# Altium PCB Main.PcbDoc (part 1 of 4)
Units mil, origin at the board's own origin, x right, y up, seen from the top; angles counter-clockwise.
Board outline 16000 x 4900 mil, 4 copper layers (L1-Top, L2-Mid-A, L3-Mid-B, L4-Bottom), stack 285.556 mil thick; 96 components, 105 nets, 278 pads, 8355 vias.
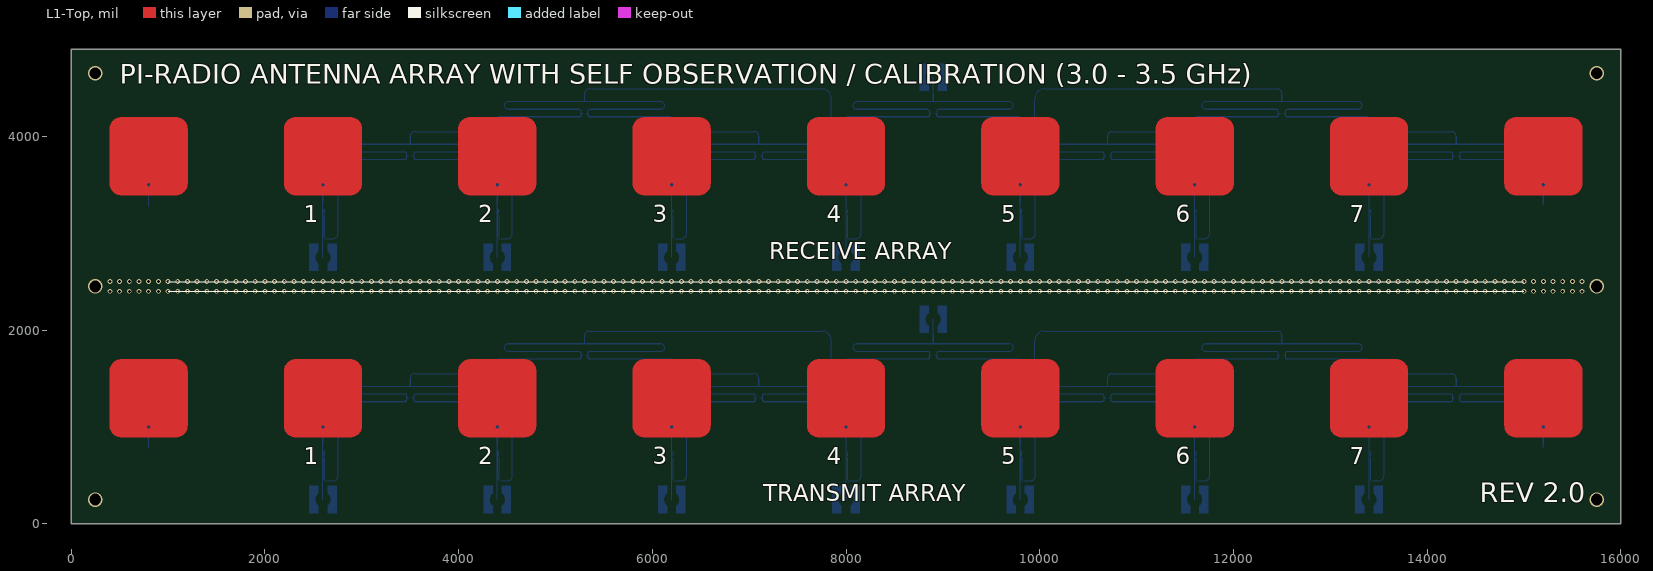
[diagram p0: L1-Top view]
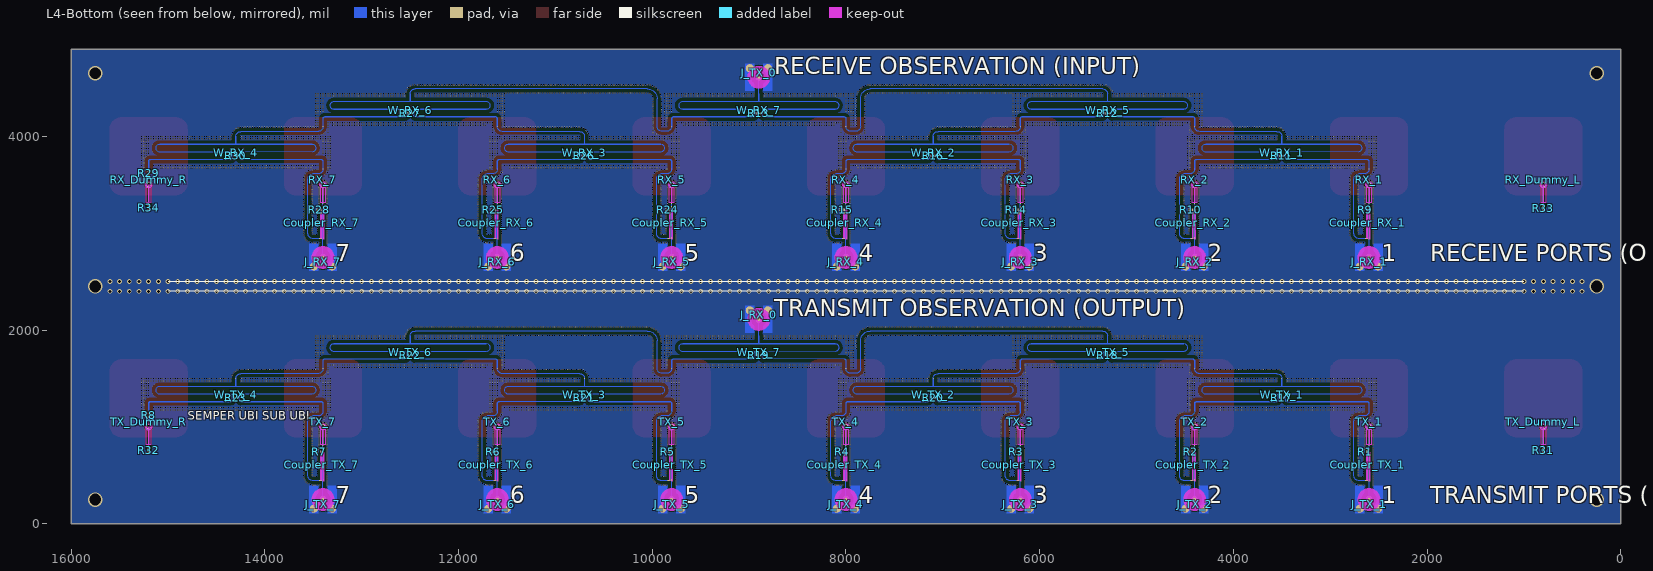
[diagram p1: L4-Bottom view, seen from below]
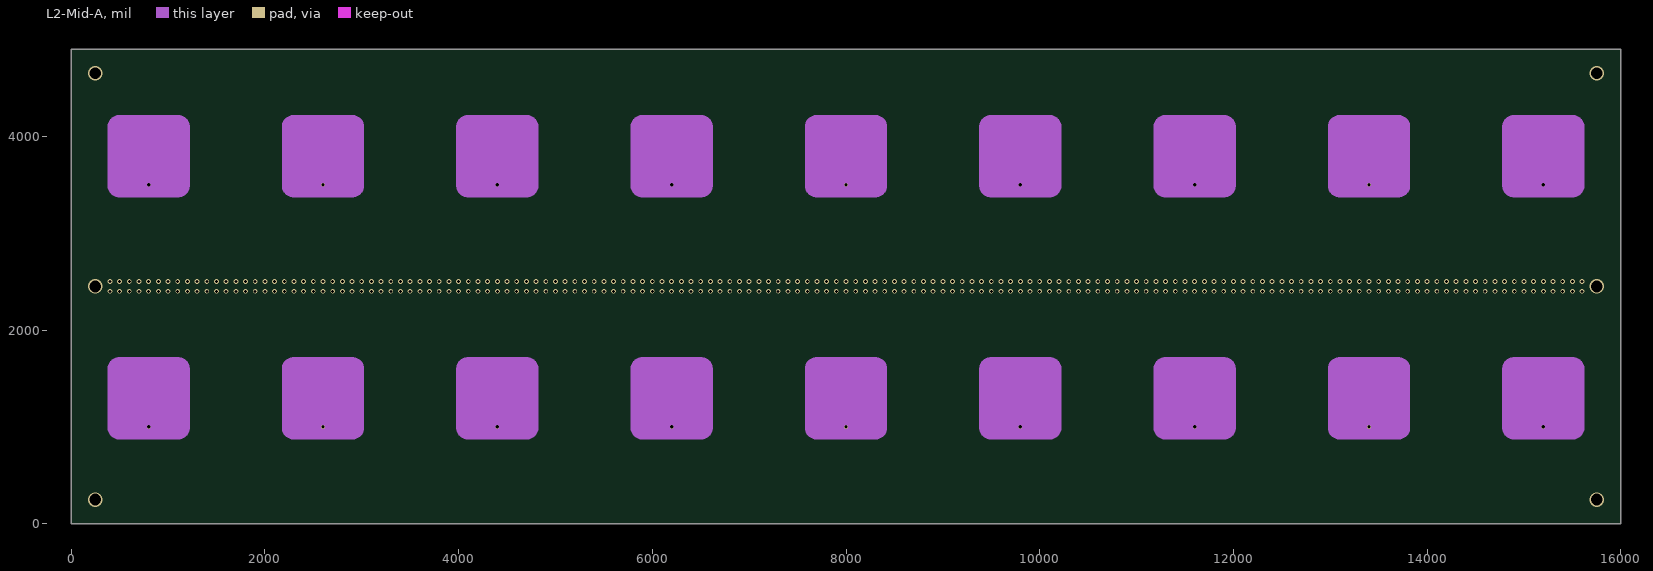
[diagram p2: L2-Mid-A]
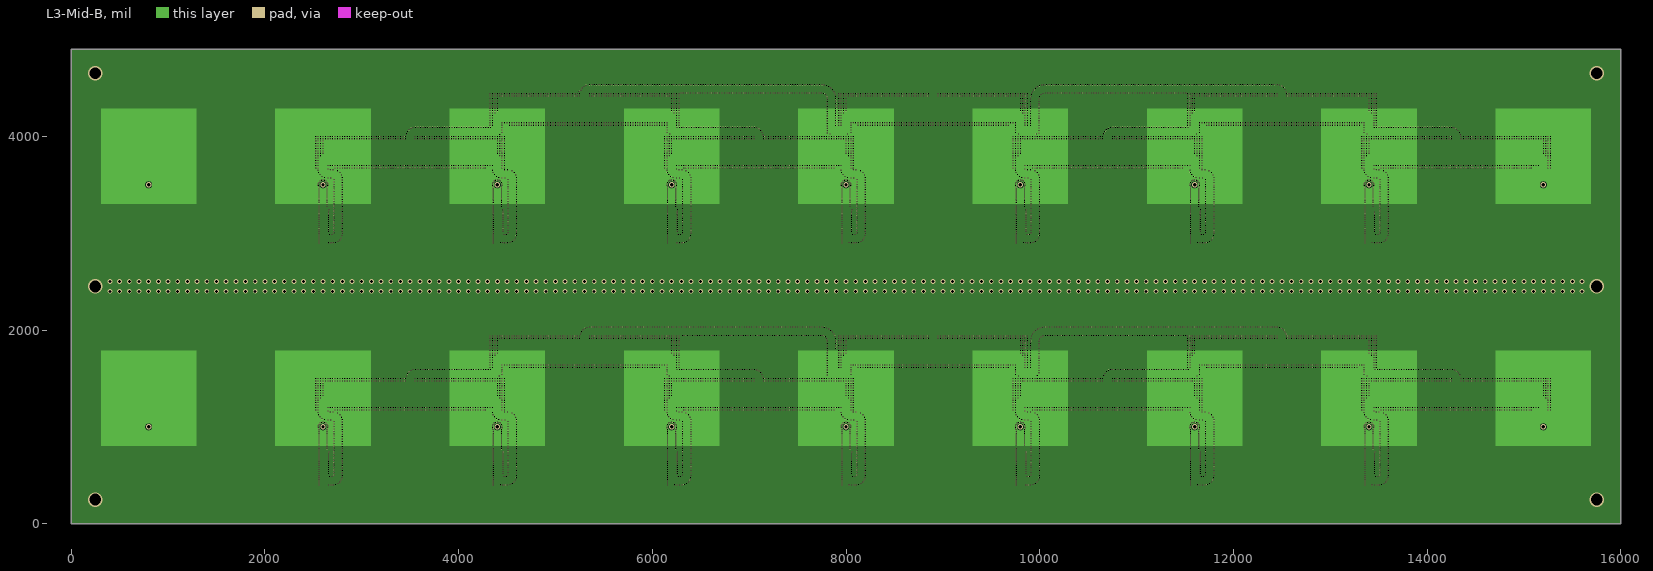
[diagram p3: L3-Mid-B]
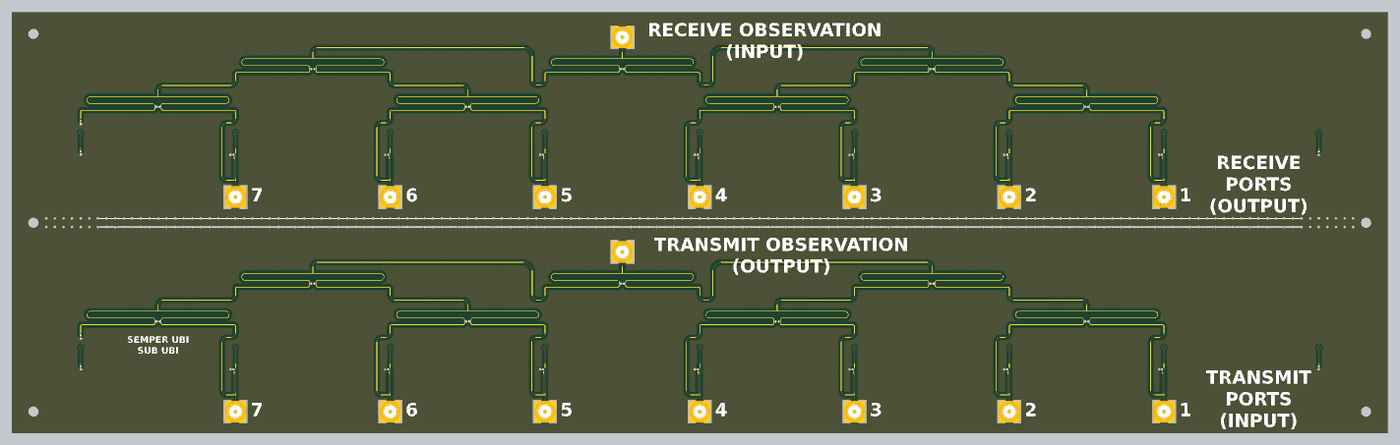
[diagram p7: 3D render of the assembled board from below, using the file's embedded part models]

## Layer stack, top to bottom
Top Solder: solder mask 0.4, Solder Resist, Dk 3.5
L1-Top: signal copper 1.4
Dielectric 1: prepreg 138, FR408HR, Dk 3.7
L2-Mid-A: signal copper 1.4
Dielectric 2: prepreg 138, FR408HR, Dk 3.7
L3-Mid-B: signal copper 1.378
Dielectric 3: prepreg 4, Isola I-Speed, Dk 3.7
L4-Bottom: signal copper 1.378
Bottom Solder: solder mask 0.4, Solder Resist, Dk 3.5

## Board outline
0,0 16000,0 16000,4900 0,4900

## Design rules (kind name [scope] priority, off if disabled: settings)
Clearance Clearance_Connector [HasFootprint('AMPHENOL RF 132134-10 USTRIP 9.4MIL WIDTH') vs HasFootprint('AMPHENOL RF 132134-10 USTRIP 9.4MIL WIDTH')] p1: gap=0 ignorepadtopadclearanceinfootprint=FALSE
Clearance Clearance_uStrip_50 [InNetClass('uStrip_50')] p2: gap=0 ignorepadtopadclearanceinfootprint=FALSE except(30: Arc-Poly Track-Poly)
Clearance Clearance_Coupler_Intra [HasFootprint('COUPLER_V1') vs HasFootprint('COUPLER_V1')] p3: gap=0 ignorepadtopadclearanceinfootprint=FALSE
Clearance Clearance_Coupler [HasFootprint('COUPLER_V1')] p4: gap=0 ignorepadtopadclearanceinfootprint=FALSE except(30: Fill-Poly)
Clearance Clearance_Wilkinson [HasFootprint('Wilkinson_v1')] p5: gap=0 ignorepadtopadclearanceinfootprint=FALSE except(30: Arc-Fill Arc-Poly Arc-Region Track-Fill Track-Poly Track-Region; 35: Poly-Region)
Clearance [All] p6: gap=10 ignorepadtopadclearanceinfootprint=FALSE
HoleSize [All] p1: absolutevalues=TRUE maxlimit=120 minlimit=1 maxpercent=80.000 minpercent=20.000
MinimumSolderMaskSliver [All] p1: minsoldermaskwidth=5
PolygonConnect [All] p1: connectstyle=Direct reliefconductorwidth=10 reliefentries=4 polygonreliefangle="90 Angle" airgapwidth=10
RoutingVias [All] p1: holewidth=28 width=50 viastyle="Through Hole" minholewidth=28 minwidth=50 maxholewidth=28 maxwidth=50
SolderMaskExpansion [All] p1: expansion=4 istentingtop=FALSE
SupplyNets "Schematic Supply Nets" [InNet('GND')] p1: voltage=0.000
Width [All] p1: maxlimit=10 minlimit=9.4 preferedwidth=10 toplayer_minwidth=10 midlayer1_minwidth=10 midlayer2_minwidth=10 bottomlayer_prefwidth=9.4 minimp=50.000000 maximp=50.000000 favimp=50.000000
28 further rules are at their usual default settings.

## Classes and differential pairs
net class uStrip_50: CB_RX_1 CB_RX_2 CB_RX_3 CB_RX_4 CB_RX_5 CB_RX_6 CB_RX_7 CB_TX_1 CB_TX_2 CB_TX_3 CB_TX_4 CB_TX_5 CB_TX_6 CB_TX_7 NetCoupler_RX_1_In NetCoupler_RX_1_Out NetCoupler_RX_2_In NetCoupler_RX_2_Out NetCoupler_RX_3_In NetCoupler_RX_3_Out NetCoupler_RX_4_In NetCoupler_RX_4_Out NetCoupler_RX_5_In NetCoupler_RX_5_Out NetCoupler_RX_6_In NetCoupler_RX_6_Out NetCoupler_RX_7_In NetCoupler_RX_7_Out NetCoupler_TX_1_In NetCoupler_TX_1_Out NetCoupler_TX_2_In NetCoupler_TX_2_Out NetCoupler_TX_3_In NetCoupler_TX_3_Out NetCoupler_TX_4_In NetCoupler_TX_4_Out NetCoupler_TX_5_In NetCoupler_TX_5_Out NetCoupler_TX_6_In NetCoupler_TX_6_Out NetCoupler_TX_7_In NetCoupler_TX_7_Out NetR31_2 NetR32_2 NetR33_2 NetR34_2 Obs_RX_8 Obs_RX_12 Obs_RX_34 Obs_RX_56 Obs_RX_78 Obs_RX_1234 Obs_RX_5678 Obs_RX_All Obs_TX_8 Obs_TX_12 Obs_TX_34 Obs_TX_56 Obs_TX_78 Obs_TX_1234 Obs_TX_5678 Obs_TX_All

## Components (designator, comment, footprint, x,y, rotation, side; value= is the part's Value field where it differs from the comment)
Coupler_RX_1 "Coupler" COUPLER_V1 2600,2940 r90 top locked net-tie
Coupler_RX_2 "Coupler" COUPLER_V1 4400,2940 r90 top locked net-tie
Coupler_RX_3 "Coupler" COUPLER_V1 6200,2940 r90 top locked net-tie
Coupler_RX_4 "Coupler" COUPLER_V1 8000,2940 r90 top locked net-tie
Coupler_RX_5 "Coupler" COUPLER_V1 9800,2940 r90 top locked net-tie
Coupler_RX_6 "Coupler" COUPLER_V1 11600,2940 r90 top locked net-tie
Coupler_RX_7 "Coupler" COUPLER_V1 13400,2940 r90 top locked net-tie
Coupler_TX_1 "Coupler" COUPLER_V1 2600,440 r90 top locked net-tie
Coupler_TX_2 "Coupler" COUPLER_V1 4400,440 r90 top locked net-tie
Coupler_TX_3 "Coupler" COUPLER_V1 6200,440 r90 top locked net-tie
Coupler_TX_4 "Coupler" COUPLER_V1 8000,440 r90 top locked net-tie
Coupler_TX_5 "Coupler" COUPLER_V1 9800,440 r90 top locked net-tie
Coupler_TX_6 "Coupler" COUPLER_V1 11600,440 r90 top locked net-tie
Coupler_TX_7 "Coupler" COUPLER_V1 13400,440 r90 top locked net-tie
J_RX_0 "Amphenol RF 132134-10" "AMPHENOL RF 132134-10 USTRIP 9.4MIL WIDTH" 8900,2110 r0 bottom
J_RX_1 "Amphenol RF 132134-10" "Amphenol RF 132134-10 uStrip 9.4mil width" 2600,2750 r180 bottom locked
J_RX_2 "Amphenol RF 132134-10" "Amphenol RF 132134-10 uStrip 9.4mil width" 4400,2750 r180 bottom locked
J_RX_3 "Amphenol RF 132134-10" "Amphenol RF 132134-10 uStrip 9.4mil width" 6200,2750 r180 bottom locked
J_RX_4 "Amphenol RF 132134-10" "Amphenol RF 132134-10 uStrip 9.4mil width" 8000,2750 r180 bottom locked
J_RX_5 "Amphenol RF 132134-10" "Amphenol RF 132134-10 uStrip 9.4mil width" 9800,2750 r180 bottom locked
J_RX_6 "Amphenol RF 132134-10" "Amphenol RF 132134-10 uStrip 9.4mil width" 11600,2750 r180 bottom locked
J_RX_7 "Amphenol RF 132134-10" "Amphenol RF 132134-10 uStrip 9.4mil width" 13400,2750 r180 bottom locked
J_TX_0 "Amphenol RF 132134-10" "Amphenol RF 132134-10 uStrip 9.4mil width" 8900,4610 r0 bottom
J_TX_1 "Amphenol RF 132134-10" "AMPHENOL RF 132134-10 USTRIP 9.4MIL WIDTH" 2600,250 r180 bottom
J_TX_2 "Amphenol RF 132134-10" "AMPHENOL RF 132134-10 USTRIP 9.4MIL WIDTH" 4400,250 r180 bottom
J_TX_3 "Amphenol RF 132134-10" "AMPHENOL RF 132134-10 USTRIP 9.4MIL WIDTH" 6200,250 r180 bottom
J_TX_4 "Amphenol RF 132134-10" "AMPHENOL RF 132134-10 USTRIP 9.4MIL WIDTH" 8000,250 r180 bottom
J_TX_5 "Amphenol RF 132134-10" "AMPHENOL RF 132134-10 USTRIP 9.4MIL WIDTH" 9800,250 r180 bottom
J_TX_6 "Amphenol RF 132134-10" "AMPHENOL RF 132134-10 USTRIP 9.4MIL WIDTH" 11600,250 r180 bottom
J_TX_7 "Amphenol RF 132134-10" "AMPHENOL RF 132134-10 USTRIP 9.4MIL WIDTH" 13400,250 r180 bottom
R1 "50" SMD-0402#1 2640.59,742.2 r180 bottom
R2 "50" SMD-0402#1 4440.59,742.2 r180 bottom
R3 "50" SMD-0402#1 6240.59,742.2 r180 bottom
R4 "50" SMD-0402#1 8040.59,742.2 r180 bottom
R5 "50" SMD-0402#1 9840.59,742.2 r180 bottom
R6 "50" SMD-0402#1 11640.59,742.2 r180 bottom
R7 "50" SMD-0402#1 13440.59,742.2 r180 bottom
R8 "50" SMD-0402#2 15200,1120 r90 bottom
R9 "50" SMD-0402#1 2640.59,3242.2 r180 bottom locked
R10 "50" SMD-0402#1 4440.59,3242.2 r180 bottom locked
R11 "100" SMD-0402#1 3500,3800.4 r180 bottom locked
R12 "100" SMD-0402#1 5300,4240.4 r180 bottom locked
R13 "100" SMD-0402#1 8900,4240.4 r180 bottom locked
R14 "50" SMD-0402#1 6240.59,3242.2 r180 bottom locked
R15 "50" SMD-0402#1 8040.59,3242.2 r180 bottom locked
R16 "100" SMD-0402#1 7100,3800.4 r180 bottom locked
R17 "100" SMD-0402#1 3500,1300.4 r180 bottom locked
R18 "100" SMD-0402#1 5300,1740.4 r180 bottom locked
R19 "100" SMD-0402#1 8900,1740.4 r180 bottom locked
R20 "100" SMD-0402#1 7100,1300.4 r180 bottom locked
R21 "100" SMD-0402#1 10700,1300.4 r180 bottom locked
R22 "100" SMD-0402#1 12500,1740.4 r180 bottom locked
R23 "100" SMD-0402#1 14300,1300.4 r180 bottom locked
R24 "50" SMD-0402#1 9840.59,3242.2 r180 bottom locked
R25 "50" SMD-0402#1 11640.59,3242.2 r180 bottom locked
R26 "100" SMD-0402#1 10700,3800.4 r180 bottom locked
R27 "100" SMD-0402#1 12501,4240.4 r180 bottom locked
R28 "50" SMD-0402#1 13440.59,3242.2 r180 bottom
R29 "50" SMD-0402#2 15200,3620 r90 bottom
R30 "100" SMD-0402#1 14300,3800.4 r180 bottom
R31 "50" SMD-0402#2 800,760 r90 bottom locked
R32 "50" SMD-0402#2 15200,760 r90 bottom locked
R33 "50" SMD-0402#2 800,3260 r90 bottom
R34 "50" SMD-0402#2 15200,3265 r90 bottom
RX_1 "Antenna" ANTENNA_V1 2600,3500 r270 top locked net-tie
RX_2 "Antenna" ANTENNA_V1 4400,3500 r270 top locked net-tie
RX_3 "Antenna" ANTENNA_V1 6200,3500 r270 top locked net-tie
RX_4 "Antenna" ANTENNA_V1 8000,3500 r270 top locked net-tie
RX_5 "Antenna" ANTENNA_V1 9800,3500 r270 top locked net-tie
RX_6 "Antenna" ANTENNA_V1 11600,3500 r270 top locked net-tie
RX_7 "Antenna" ANTENNA_V1 13400,3500 r270 top locked net-tie
RX_Dummy_L "Antenna" Antenna_v1 800,3500 r270 top locked net-tie
RX_Dummy_R "Antenna" Antenna_v1 15200,3500 r270 top locked net-tie
TX_1 "Antenna" ANTENNA_V1 2600,1000 r270 top net-tie
TX_2 "Antenna" ANTENNA_V1 4400,1000 r270 top net-tie
TX_3 "Antenna" ANTENNA_V1 6200,1000 r270 top net-tie
TX_4 "Antenna" ANTENNA_V1 8000,1000 r270 top net-tie
TX_5 "Antenna" ANTENNA_V1 9800,1000 r270 top net-tie
TX_6 "Antenna" ANTENNA_V1 11600,1000 r270 top net-tie
TX_7 "Antenna" ANTENNA_V1 13400,1000 r270 top net-tie
TX_Dummy_L "Antenna" Antenna_v1 800,1000 r270 top locked net-tie
TX_Dummy_R "Antenna" Antenna_v1 15200,1000 r270 top locked net-tie
W_RX_1 "Wilkinson" Wilkinson_v1 3500,4000 r180 top locked net-tie
W_RX_2 "Wilkinson" Wilkinson_v1 7100,4000 r180 top locked net-tie
W_RX_3 "Wilkinson" Wilkinson_v1 10700,4000 r180 top locked net-tie
W_RX_4 "Wilkinson" Wilkinson_v1 14300,4000 r180 top locked net-tie
W_RX_5 "Wilkinson" Wilkinson_v1 5300,4440 r180 top locked net-tie
W_RX_6 "Wilkinson" Wilkinson_v1 12500,4440 r180 top locked net-tie
W_RX_7 "Wilkinson" Wilkinson_v1 8900,4440 r180 top locked net-tie
W_TX_1 "Wilkinson" WILKINSON_V1 3500,1500 r180 top locked net-tie
W_TX_2 "Wilkinson" WILKINSON_V1 7100,1500 r180 top locked net-tie
W_TX_3 "Wilkinson" WILKINSON_V1 10700,1500 r180 top locked net-tie
W_TX_4 "Wilkinson" WILKINSON_V1 14300,1500 r180 top locked net-tie
W_TX_5 "Wilkinson" WILKINSON_V1 5300,1940 r180 top locked net-tie
W_TX_6 "Wilkinson" WILKINSON_V1 12500,1940 r180 top locked net-tie
W_TX_7 "Wilkinson" WILKINSON_V1 8900,1940 r180 top locked net-tie

## Footprints (in the part's own frame and the unit in brackets; to place one, negate y for a bottom-side part, rotate by r counter-clockwise, add the part's x,y. Pads: shape width x height; smd on the part's side, far side on the other; paste and mask are expansions set on the pad)
"AMPHENOL RF 132134-10 USTRIP 9.4MIL WIDTH" [mm] "RF / Coaxial Connector, SMA Coaxial, Straight Jack, Surface Mount Vertical, 50 ohm"
  round 2.115 smd paste+0 mask+0: G(-2.38,-2.38) G(2.38,-2.38)
  round 1.73 smd paste+0 mask+0: S(0,0)
  L1-Top region: -1.205,-3.555 -3.555,-3.555 -3.555,3.555 -1.205,3.555 -1.205,1.652 -1.823,0.927 -2.045,0 -1.823,-0.927 -1.205,-1.652 -1.205,-1.652
  L1-Top region: 1.205,-3.555 3.555,-3.555 3.555,3.555 1.205,3.555 1.205,1.652 1.823,0.927 2.045,0 1.823,-0.927 1.205,-1.652 1.205,-1.652
  L1-Top lines w0.239: 0,3.655 0,0
  L1-Top keep-out circle w2.54: c0,0 r1.714
  body extent -3.17,-3.18 3.18,3.17, height 9.24
"Amphenol RF 132134-10 uStrip 9.4mil width" [mm] "RF / Coaxial Connector, SMA Coaxial, Straight Jack, Surface Mount Vertical, 50 ohm"
  round 2.115 smd paste+0 mask+0: G(-2.38,-2.38) G(2.38,-2.38)
  round 1.73 smd paste+0 mask+0: S(0,0)
  L1-Top region: 1.205,-3.555 3.555,-3.555 3.555,3.555 1.205,3.555 1.205,1.652 1.823,0.927 2.045,0 1.823,-0.927 1.205,-1.652 1.205,-1.652
  L1-Top region: -1.205,-3.555 -3.555,-3.555 -3.555,3.555 -1.205,3.555 -1.205,1.652 -1.823,0.927 -2.045,0 -1.823,-0.927 -1.205,-1.652 -1.205,-1.652
  L1-Top lines w0.239: 0,0 0,3.655
  L1-Top keep-out circle w2.54: c0,0 r1.714
  body extent -3.18,-3.18 3.18,3.18, height 9.24
ANTENNA_V1 [mil]
  round 1 on Mid2 paste-3: G(-295.28,0)
  rect 9.4x9.4 smd far side paste-5 mask+0: S(192.15,0)
  L1-Top region: -696.79,-283.46 -696.79,283.46 -687.8,328.64 -662.21,366.94 -623.91,392.52 -578.74,401.51 -578.74,401.51 -11.81,401.51 33.36,392.52 71.66,366.94 97.25,328.64 106.23,283.46 106.24,283.46 106.24,0.06 19.75,0.06 17.08,9.92 9.84,17.12 -0.03,19.75 -9.89,17.09 -17.11,9.87 -19.75,0 -19.75,0 -17.11,-9.87 -9.89,-17.09 -0.03,-19.75 9.84,-17.12 17.08,-9.92 19.75,-0.06 19.75,-0.06 106.24,-0.06 106.24,-283.46 97.25,-328.64 71.66,-366.94 33.36,-392.52 -11.81,-401.51 -11.81,-401.51 -578.74,-401.51 -623.91,-392.52 -662.21,-366.94 -687.8,-328.64 -696.79,-283.46
  L2-Mid-A region: -718.5,-305.12 -718.5,305.12 -702.68,364.17 -659.45,407.4 -600.39,423.23 -600.39,423.23 9.84,423.23 68.9,407.4 112.13,364.17 127.95,305.12 127.95,305.12 127.95,-305.12 118.96,-350.32 93.36,-388.63 55.04,-414.24 9.84,-423.23 9.84,-423.23 -600.39,-423.23 -645.59,-414.24 -683.91,-388.63 -709.51,-350.32 -718.5,-305.12
  L3-Mid-B region: -787.34,-492.06 -787.34,492.06 196.79,492.06 196.79,0.06 39.43,0.06 34.12,19.76 19.68,34.17 -0.03,39.43 -19.74,34.14 -34.16,19.71 -39.43,0 -39.43,0 -34.16,-19.71 -19.74,-34.14 -0.03,-39.43 19.68,-34.17 34.12,-19.76 39.43,-0.06 39.43,-0.06 196.79,-0.06 196.79,-492.06
  L4-Bottom region: 0,-4.7 187.45,-4.7 187.45,4.7 0,4.7
  L4-Bottom region: -27.56,0 -25.46,-10.55 -19.49,-19.49 -10.55,-25.46 0,-27.56 0,-27.56 10.55,-25.46 19.49,-19.49 25.46,-10.55 27.56,0 27.56,0 25.46,10.55 19.49,19.49 10.55,25.46 0,27.56 0,27.56 -10.55,25.46 -19.49,19.49 -25.46,10.55 -27.56,0
  L4-Bottom lines w9.4: 192.15,0 0,0
  L4-Bottom keep-out circle w1: c0,0 r33
  L4-Bottom keep-out region: 0,-24 185,-24 185,0 0,0
  L4-Bottom keep-out region: 0,0 185,0 185,24 0,24
Antenna_v1 [mil]
  round 1 on Mid2 paste-3: G(-295.28,0)
  rect 9.4x9.4 smd far side paste-5 mask+0: S(192.15,0)
  L1-Top region: -696.79,-283.46 -696.79,283.46 -687.8,328.64 -662.21,366.94 -623.91,392.52 -578.74,401.51 -578.74,401.51 -11.81,401.51 33.36,392.52 71.66,366.94 97.25,328.64 106.23,283.46 106.24,283.46 106.24,0.06 19.75,0.06 17.08,9.92 9.84,17.12 -0.03,19.75 -9.89,17.09 -17.11,9.87 -19.75,0 -19.75,0 -17.11,-9.87 -9.89,-17.09 -0.03,-19.75 9.84,-17.12 17.08,-9.92 19.75,-0.06 19.75,-0.06 106.24,-0.06 106.24,-283.46 97.25,-328.64 71.66,-366.94 33.36,-392.52 -11.81,-401.51 -11.81,-401.51 -578.74,-401.51 -623.91,-392.52 -662.21,-366.94 -687.8,-328.64 -696.79,-283.46
  L2-Mid-A region: -718.5,-305.12 -718.5,305.12 -702.68,364.17 -659.45,407.4 -600.39,423.23 -600.39,423.23 9.84,423.23 68.9,407.4 112.13,364.17 127.95,305.12 127.95,305.12 127.95,-305.12 118.96,-350.32 93.36,-388.63 55.04,-414.24 9.84,-423.23 9.84,-423.23 -600.39,-423.23 -645.59,-414.24 -683.91,-388.63 -709.51,-350.32 -718.5,-305.12
  L3-Mid-B region: -787.34,-492.06 -787.34,492.06 196.79,492.06 196.79,0.06 39.43,0.06 34.12,19.76 19.68,34.17 -0.03,39.43 -19.74,34.14 -34.16,19.71 -39.43,0 -39.43,0 -34.16,-19.71 -19.74,-34.14 -0.03,-39.43 19.68,-34.17 34.12,-19.76 39.43,-0.06 39.43,-0.06 196.79,-0.06 196.79,-492.06
  L4-Bottom region: 0,-4.7 187.45,-4.7 187.45,4.7 0,4.7
  L4-Bottom region: -27.56,0 -25.46,-10.55 -19.49,-19.49 -10.55,-25.46 0,-27.56 0,-27.56 10.55,-25.46 19.49,-19.49 25.46,-10.55 27.56,0 27.56,0 25.46,10.55 19.49,19.49 10.55,25.46 0,27.56 0,27.56 -10.55,25.46 -19.49,19.49 -25.46,10.55 -27.56,0
  L4-Bottom lines w9.4: 192.15,0 0,0
  L4-Bottom keep-out circle w1: c0,0 r33
  L4-Bottom keep-out region: 0,0 185,0 185,24 0,24
  L4-Bottom keep-out region: 0,-24 185,-24 185,0 0,0
COUPLER_V1 [mil]
  rect 30x9.4 smd far side paste-5 mask+0: 50_Ohm(264.4,-15.76)
  rect 20x9.4 smd far side paste-5 mask+0: In(10,0) Out(330,0)
  rect 9.4x30 smd far side paste-5 mask+0: Obs(4.7,-26.06)
  L4-Bottom region: 9.4,-20.46 249.4,-20.46 249.4,-11.06 9.4,-11.06
  L4-Bottom region: 20,-4.7 320,-4.7 320,4.7 20,4.7
  L4-Bottom lines w9.4: 10,0 330,0 ; 4.7,-15.76 4.7,-26.06
  L4-Bottom keep-out region: 9.4,-21.46 259.4,-21.46 259.4,-20.46 9.4,-20.46
  L4-Bottom keep-out region: 0,4.7 300,4.7 300,5.7 0,5.7
SMD-0402#1 [mm] "0402 Imperial"
  rect 0.5x0.65 smd mask+0: 1(-0.5,0) 2(0.5,0)
  body extent -0.5,-0.25 0.5,0.25, height 0.56
SMD-0402#2 [mm] "0402 Imperial"
  rect 0.5x0.65 smd mask+0.05: 1(-0.5,0) 2(0.5,0)
  body extent -0.5,-0.25 0.5,0.25, height 0.56
Wilkinson_v1 [mil]
  round 5 smd far side paste-5 mask+0: 1(900,337.4) 2(-900,337.4) C(0,0)
  round 5 smd far side paste-5 mask-5: Res_Pad1(34.58,199.6) Res_Pad2(-34.58,199.6)
  L4-Bottom region: -787.4,84.24 -803.29,87.87 -816.03,98.03 -823.1,112.71 -823.1,129.01 -816.03,143.69 -803.29,153.85 -787.4,157.48 -787.4,157.48 -57.01,157.48 -48.43,159.19 -41.15,164.05 -36.29,171.33 -34.58,179.92 -34.58,179.92 -34.58,219.29 -32.63,219.29 -34.48,228.62 -39.77,236.53 -47.68,241.81 -57.01,243.67 -57.01,243.67 -880.31,243.67 -886.05,244.81 -890.91,248.06 -894.16,252.92 -895.3,258.66 -895.3,258.66 -895.3,337.4 -904.7,337.4 -904.7,258.66 -902.84,249.32 -897.56,241.41 -889.65,236.13 -880.31,234.27 -880.31,234.27 -57.01,234.27 -51.28,233.13 -46.42,229.88 -43.17,225.02 -42.03,219.29 -42.03,219.29 -40.08,219.29 -40.08,179.92 -41.37,173.43 -45.04,167.94 -50.53,164.27 -57.01,162.98 -57.01,162.98 -787.4,162.98 -805.68,158.81 -820.33,147.12 -828.47,130.23 -828.47,111.49 -820.33,94.6 -805.68,82.91 -787.4,78.74 -787.4,78.74 -4.7,78.74 -4.7,0 4.7,0 4.7,78.74 787.4,78.74 805.68,82.91 820.33,94.6 828.47,111.49 828.47,130.23 820.33,147.12 805.68,158.81 787.4,162.98 787.4,162.98 57.01,162.98 50.53,164.27 45.04,167.94 41.37,173.43 40.08,179.92 40.08,179.92 40.08,219.29 42.03,219.29 43.17,225.02 46.42,229.88 51.28,233.13 57.01,234.27 57.01,234.27 880.32,234.27 889.65,236.13 897.56,241.41 902.84,249.32 904.7,258.66 904.7,258.66 904.7,337.4 895.3,337.4 895.3,258.66 894.16,252.92 890.91,248.06 886.05,244.81 880.32,243.67 880.32,243.67 57.01,243.67 47.68,241.81 39.77,236.53 34.48,228.62 32.63,219.29 32.63,219.29 34.58,219.29 34.58,179.92 36.29,171.33 41.15,164.05 48.43,159.19 57.01,157.48 57.01,157.48 787.4,157.48 803.29,153.85 816.03,143.69 823.1,129.01 823.1,112.71 816.03,98.03 803.29,87.87 787.4,84.24 787.4,84.24
WILKINSON_V1 [mil]
  round 5 smd far side paste-5 mask+0: 1(900,337.4) 2(-900,337.4) C(0,0)
  round 5 smd far side paste-5 mask-5: Res_Pad1(34.58,199.6) Res_Pad2(-34.58,199.6)
  L4-Bottom region: -787.4,84.24 -803.29,87.87 -816.03,98.03 -823.1,112.71 -823.1,129.01 -816.03,143.69 -803.29,153.85 -787.4,157.48 -787.4,157.48 -57.01,157.48 -48.43,159.19 -41.15,164.05 -36.29,171.33 -34.58,179.92 -34.58,179.92 -34.58,219.29 -32.63,219.29 -34.48,228.62 -39.77,236.53 -47.68,241.81 -57.01,243.67 -57.01,243.67 -880.31,243.67 -886.05,244.81 -890.91,248.06 -894.16,252.92 -895.3,258.66 -895.3,258.66 -895.3,337.4 -904.7,337.4 -904.7,258.66 -902.84,249.32 -897.56,241.41 -889.65,236.13 -880.31,234.27 -880.31,234.27 -57.01,234.27 -51.28,233.13 -46.42,229.88 -43.17,225.02 -42.03,219.29 -42.03,219.29 -40.08,219.29 -40.08,179.92 -41.37,173.43 -45.04,167.94 -50.53,164.27 -57.01,162.98 -57.01,162.98 -787.4,162.98 -805.68,158.81 -820.33,147.12 -828.47,130.23 -828.47,111.49 -820.33,94.6 -805.68,82.91 -787.4,78.74 -787.4,78.74 -4.7,78.74 -4.7,0 4.7,0 4.7,78.74 787.4,78.74 805.68,82.91 820.33,94.6 828.47,111.49 828.47,130.23 820.33,147.12 805.68,158.81 787.4,162.98 787.4,162.98 57.01,162.98 50.53,164.27 45.04,167.94 41.37,173.43 40.08,179.92 40.08,179.92 40.08,219.29 42.03,219.29 43.17,225.02 46.42,229.88 51.28,233.13 57.01,234.27 57.01,234.27 880.32,234.27 889.65,236.13 897.56,241.41 902.84,249.32 904.7,258.66 904.7,258.66 904.7,337.4 895.3,337.4 895.3,258.66 894.16,252.92 890.91,248.06 886.05,244.81 880.32,243.67 880.32,243.67 57.01,243.67 47.68,241.81 39.77,236.53 34.48,228.62 32.63,219.29 32.63,219.29 34.58,219.29 34.58,179.92 36.29,171.33 41.15,164.05 48.43,159.19 57.01,157.48 57.01,157.48 787.4,157.48 803.29,153.85 816.03,143.69 823.1,129.01 823.1,112.71 816.03,98.03 803.29,87.87 787.4,84.24 787.4,84.24

## Part data
J_RX_0 J_RX_1 J_RX_2 J_RX_3 J_RX_4 J_RX_5 J_RX_6 J_RX_7 J_TX_0 J_TX_1 J_TX_2 J_TX_3 J_TX_4 J_TX_5 J_TX_6 J_TX_7: "RF / Coaxial Connector, SMA Coaxial, Straight Jack, Surface Mount Vertical, 50 ohm", Package=None, Availability=Unavailable, MF=Samtec, MP=SMA-J-P-H-ST-EM1, Price=None, SnapEDA_Link=https://www.snapeda.com/parts/SMA-J-P-H-ST-EM1/Samtec%20Inc./view-part/?ref=snap
R1 R2 R3 R4 R5 R6 R7 R8 R9 R10 R11 R12 R13 R14 R15 R16 R17 R18 R19 R20 R21 R22 R23 R24 R25 R26 R27 R28 R29 R30 R31 R32 R33 R34: library part RES0402, "Resistor-0402"

## Via types
v1: diameter 12, hole 6, L3-Mid-B to L4-Bottom, tented both sides, 5944 vias
v2: diameter 12, hole 6, L3-Mid-B to L4-Bottom, tented bottom, 2081 vias
v3: diameter 50, hole 31, L1-Top to L4-Bottom, tented both sides, 306 vias
v4: diameter 39.37/55.12/55.12 (per signal layer), hole 35.43, L2-Mid-A to L4-Bottom, 18 vias
v5: diameter 150, hole 120, L1-Top to L4-Bottom, 6 vias

## Nets (pads, with @x,y where several pads share a name; then routed paths per layer and width w, separated by ;. In a path a pad name is that pad's centre, name@x,y a point inside that pad or via, vN(x,y) a via of type N, cw(c..) or ccw(c..) an arc to the next point about the centre after c; other vN are vias at no path point)
CA_RX_1: Coupler_RX_1.50_Ohm R9.2 | length 42.9
  L4-Bottom w9.4: Coupler_RX_1.50_Ohm@2615.76,3204.4 2615.76,3242.2 R9.2@2620.91,3242.2
CA_RX_2: Coupler_RX_2.50_Ohm R10.2 | length 42.9
  L4-Bottom w9.4: Coupler_RX_2.50_Ohm@4415.76,3204.4 4415.76,3242.2 R10.2@4420.9,3242.2
CA_RX_3: Coupler_RX_3.50_Ohm R14.2 | length 42.9
  L4-Bottom w9.4: Coupler_RX_3.50_Ohm@6215.76,3204.4 6215.76,3242.2 R14.2@6220.9,3242.2
CA_RX_4: Coupler_RX_4.50_Ohm R15.2 | length 42.9
  L4-Bottom w9.4: Coupler_RX_4.50_Ohm@8015.76,3204.4 8015.76,3242.2 R15.2@8020.9,3242.2
CA_RX_5: Coupler_RX_5.50_Ohm R24.2 | length 42.9
  L4-Bottom w9.4: Coupler_RX_5.50_Ohm@9815.76,3204.4 9815.76,3242.2 R24.2@9820.91,3242.2
CA_RX_6: Coupler_RX_6.50_Ohm R25.2 | length 42.9
  L4-Bottom w9.4: Coupler_RX_6.50_Ohm@11615.76,3204.4 11615.76,3242.2 R25.2@11620.91,3242.2
CA_RX_7: Coupler_RX_7.50_Ohm R28.2 | length 42.9
  L4-Bottom w9.4: Coupler_RX_7.50_Ohm@13415.76,3204.4 13415.76,3242.2 R28.2@13420.91,3242.2
CA_TX_1: Coupler_TX_1.50_Ohm R1.2 | length 42.9
  L4-Bottom w9.4: Coupler_TX_1.50_Ohm@2615.76,704.4 2615.76,742.2 R1.2@2620.91,742.2
CA_TX_2: Coupler_TX_2.50_Ohm R2.2 | length 42.9
  L4-Bottom w9.4: Coupler_TX_2.50_Ohm@4415.76,704.4 4415.76,742.2 R2.2@4420.9,742.2
CA_TX_3: Coupler_TX_3.50_Ohm R3.2 | length 42.9
  L4-Bottom w9.4: Coupler_TX_3.50_Ohm@6215.76,704.4 6215.76,742.2 R3.2@6220.9,742.2
CA_TX_4: Coupler_TX_4.50_Ohm R4.2 | length 42.9
  L4-Bottom w9.4: Coupler_TX_4.50_Ohm@8015.76,704.4 8015.76,742.2 R4.2@8020.9,742.2
CA_TX_5: Coupler_TX_5.50_Ohm R5.2 | length 42.9
  L4-Bottom w9.4: Coupler_TX_5.50_Ohm@9815.76,704.4 9815.76,742.2 R5.2@9820.91,742.2
CA_TX_6: Coupler_TX_6.50_Ohm R6.2 | length 42.9
  L4-Bottom w9.4: Coupler_TX_6.50_Ohm@11615.76,704.4 11615.76,742.2 R6.2@11620.91,742.2
CA_TX_7: Coupler_TX_7.50_Ohm R7.2 | length 42.9
  L4-Bottom w9.4: Coupler_TX_7.50_Ohm@13415.76,704.4 13415.76,742.2 R7.2@13420.91,742.2
CB_RX_1: Coupler_RX_1.Obs W_RX_1.1 | length 922.5
  L4-Bottom w9.4: W_RX_1.1@2600,3662.6 ccw(c2650,3662.6) 2650,3612.6 2705,3612.6 cw(c2705,3562.61) 2755,3562.61 2755,2994.7 cw(c2705,2994.7) 2705,2944.7 2641.06,2944.7
CB_RX_2: Coupler_RX_2.Obs W_RX_1.2 | length 922.5
  L4-Bottom w9.4: W_RX_1.2@4400,3662.6 ccw(c4450,3662.6) 4450,3612.6 4505,3612.6 cw(c4505,3562.61) 4555,3562.61 4555,2994.7 cw(c4505,2994.7) 4505,2944.7 4441.06,2944.7
CB_RX_3: Coupler_RX_3.Obs W_RX_2.1 | length 922.5
  L4-Bottom w9.4: W_RX_2.1@6200,3662.6 ccw(c6250,3662.6) 6250,3612.6 6305,3612.6 cw(c6305,3562.61) 6355,3562.61 6355,2994.7 cw(c6305,2994.7) 6305,2944.7 6241.06,2944.7
CB_RX_4: Coupler_RX_4.Obs W_RX_2.2 | length 922.5
  L4-Bottom w9.4: W_RX_2.2@8000,3662.6 ccw(c8050,3662.6) 8050,3612.6 8105,3612.6 cw(c8105,3562.61) 8155,3562.61 8155,2994.7 cw(c8105,2994.7) 8105,2944.7 8041.06,2944.7
CB_RX_5: Coupler_RX_5.Obs W_RX_3.1 | length 922.5
  L4-Bottom w9.4: W_RX_3.1@9800,3662.6 ccw(c9850,3662.6) 9850,3612.6 9905,3612.6 cw(c9905,3562.61) 9955,3562.61 9955,2994.7 cw(c9905,2994.7) 9905,2944.7 9841.06,2944.7
CB_RX_6: Coupler_RX_6.Obs W_RX_3.2 | length 922.5
  L4-Bottom w9.4: W_RX_3.2@11600,3662.6 ccw(c11650,3662.6) 11650,3612.6 11705,3612.6 cw(c11705,3562.61) 11755,3562.61 11755,2994.7 cw(c11705,2994.7) 11705,2944.7 11641.06,2944.7
CB_RX_7: Coupler_RX_7.Obs W_RX_4.1 | length 922.5
  L4-Bottom w9.4: W_RX_4.1@13400,3662.6 ccw(c13450,3662.6) 13450,3612.6 13505,3612.6 cw(c13505,3562.61) 13555,3562.61 13555,2994.7 cw(c13505,2994.7) 13505,2944.7 13441.06,2944.7
CB_TX_1: Coupler_TX_1.Obs W_TX_1.1 | length 922.5
  L4-Bottom w9.4: W_TX_1.1@2600,1162.6 ccw(c2650,1162.6) 2650,1112.6 2705,1112.6 cw(c2705,1062.61) 2755,1062.61 2755,494.7 cw(c2705,494.7) 2705,444.7 2641.06,444.7
CB_TX_2: Coupler_TX_2.Obs W_TX_1.2 | length 922.5
  L4-Bottom w9.4: W_TX_1.2@4400,1162.6 ccw(c4450,1162.6) 4450,1112.6 4505,1112.6 cw(c4505,1062.61) 4555,1062.61 4555,494.7 cw(c4505,494.7) 4505,444.7 4441.06,444.7
CB_TX_3: Coupler_TX_3.Obs W_TX_2.1 | length 922.5
  L4-Bottom w9.4: W_TX_2.1@6200,1162.6 ccw(c6250,1162.6) 6250,1112.6 6305,1112.6 cw(c6305,1062.61) 6355,1062.61 6355,494.7 cw(c6305,494.7) 6305,444.7 6241.06,444.7
CB_TX_4: Coupler_TX_4.Obs W_TX_2.2 | length 922.5
  L4-Bottom w9.4: W_TX_2.2@8000,1162.6 ccw(c8050,1162.6) 8050,1112.6 8105,1112.6 cw(c8105,1062.61) 8155,1062.61 8155,494.7 cw(c8105,494.7) 8105,444.7 8041.06,444.7
CB_TX_5: Coupler_TX_5.Obs W_TX_3.1 | length 922.5
  L4-Bottom w9.4: W_TX_3.1@9800,1162.6 ccw(c9850,1162.6) 9850,1112.6 9905,1112.6 cw(c9905,1062.61) 9955,1062.61 9955,494.7 cw(c9905,494.7) 9905,444.7 9841.06,444.7
CB_TX_6: Coupler_TX_6.Obs W_TX_3.2 | length 922.5
  L4-Bottom w9.4: W_TX_3.2@11600,1162.6 ccw(c11650,1162.6) 11650,1112.6 11705,1112.6 cw(c11705,1062.61) 11755,1062.61 11755,494.7 cw(c11705,494.7) 11705,444.7 11641.06,444.7
CB_TX_7: Coupler_TX_7.Obs W_TX_4.1 | length 922.5
  L4-Bottom w9.4: W_TX_4.1@13400,1162.6 ccw(c13450,1162.6) 13450,1112.6 13505,1112.6 cw(c13505,1062.61) 13555,1062.61 13555,494.7 cw(c13505,494.7) 13505,444.7 13441.06,444.7
GND: J_RX_0.G J_RX_1.G J_RX_2.G J_RX_3.G J_RX_4.G J_RX_5.G J_RX_6.G J_RX_7.G J_TX_0.G J_TX_1.G J_TX_2.G J_TX_3.G J_TX_4.G J_TX_5.G J_TX_6.G J_TX_7.G R1.1 R2.1 R3.1 R4.1 R5.1 R6.1 R7.1 R8.1 R9.1 R10.1 R14.1 R15.1 R24.1 R25.1 R28.1 R29.1 R31.1 R32.1 R33.1 R34.1 RX_1.G RX_2.G RX_3.G RX_4.G RX_5.G RX_6.G RX_7.G RX_Dummy_L.G RX_Dummy_R.G TX_1.G TX_2.G TX_3.G TX_4.G TX_5.G TX_6.G TX_7.G TX_Dummy_L.G TX_Dummy_R.G